# Altium PCB ratopus.PcbDoc (part 2 of 3)
Units mm, origin at the board's own origin, x right, y up, seen from the top; angles counter-clockwise.
Board outline 160 x 100 mm, 2 copper layers (Top Layer, Bottom Layer); 132 components, 69 nets, 422 pads, 0 vias.
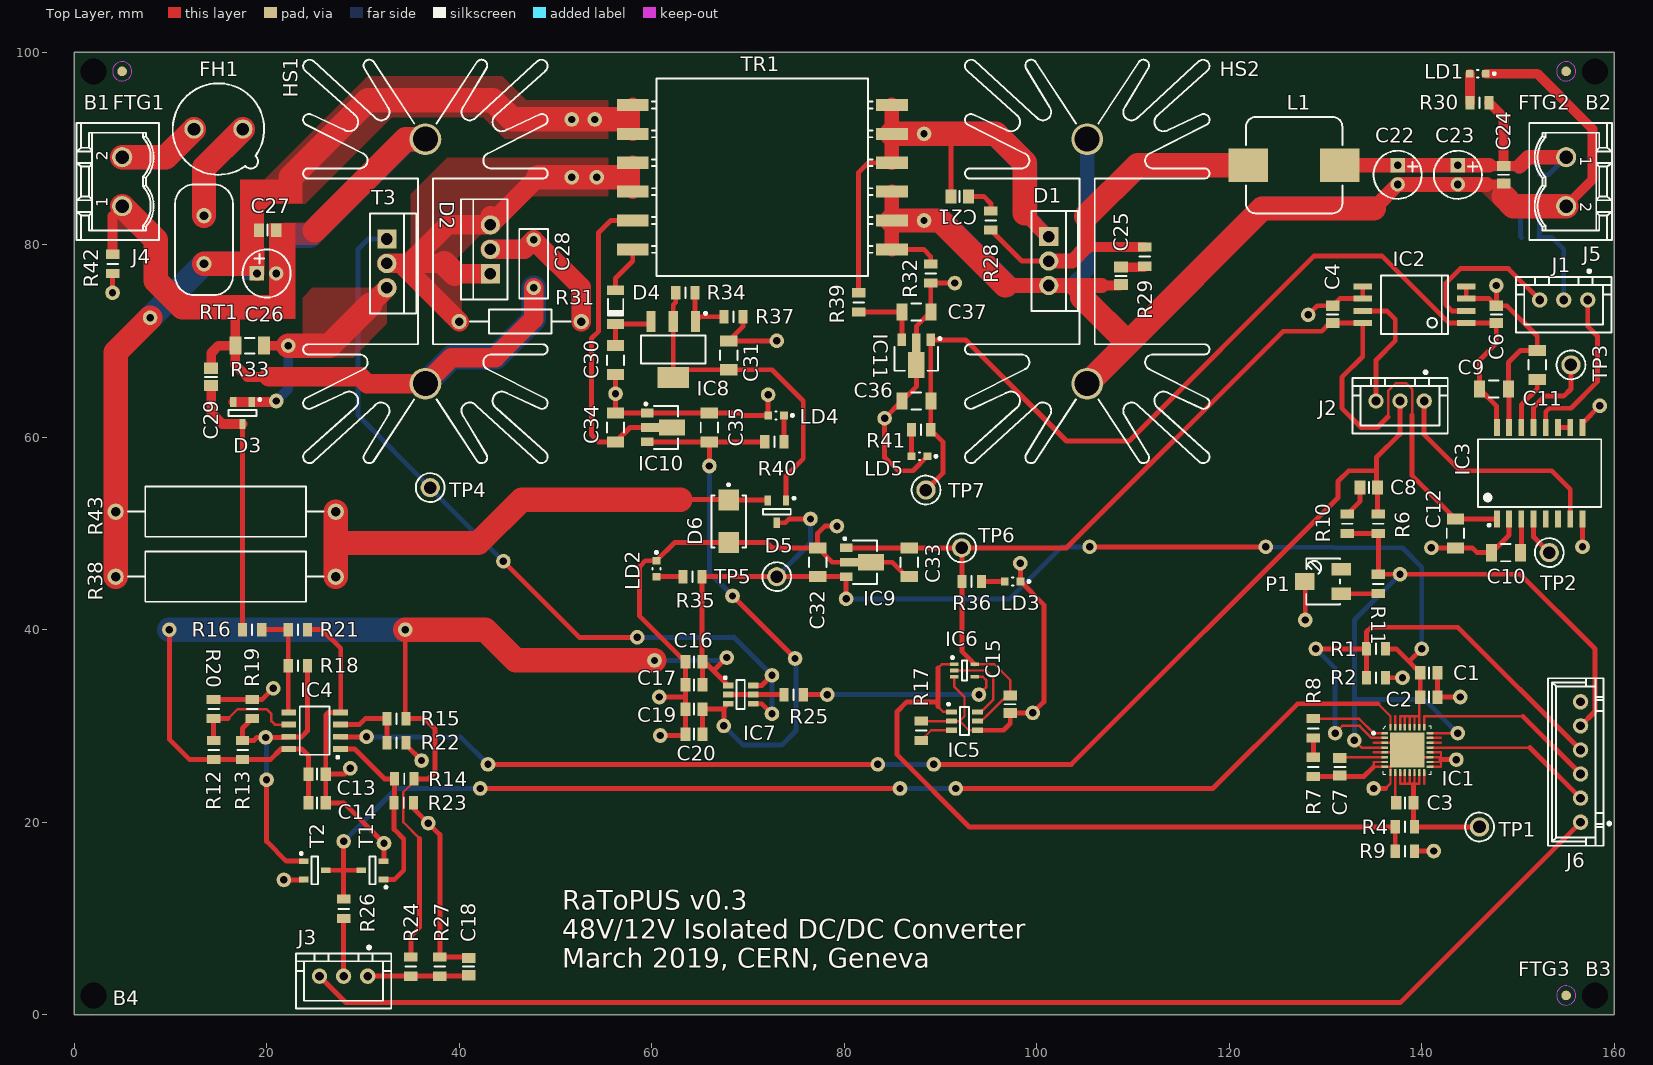
[diagram p0: Top Layer view]

## Part data (continued)
R20: library part R0805_2K_0.01%_0.2W_0.2PPM_VISHAY_VSMP, "Resistor - 0.01%", Case=0805, Manufacturer="VISHAY PRECISION", Manufacturer1 ComponentHeight=0.64mm, Manufacturer Part Number=Y16242K00000T9R, Power=0.2W, Tolerance=±0.01%, Author="CERN DEM JLC", Component Type=Standard, CreateDate=22/09/2011, HelpURL=\\cern.ch\dfs\Applications\Altium\Datasheets\R0805_VISHAY_VSMP.pdf, LatestRevisionDate=22/09/2011, Mounted=Yes, Part Description="Ultra High Precision Foil Wraparound Surface Mount Chip Resistor", Part Number=R0805_2K_0.01%_0.2W_0.2PPM_VISHAY_VSMP, Pin Count=2, PressFit=No, Sense=No, SMD=Yes, Socket=No, Status=None, TC=±0.2ppm/°C
R22: library part R0805_9K1_0.1%_0.1W_10PPM, "Resistor - 0.1%", Case=0805, Manufacturer=GENERIC, Manufacturer1 ComponentHeight=0.6mm, Manufacturer1 Example="TYCO HOLSWORTHY", Manufacturer1 Part Number=RN73C2A9K1BTG, Power=0.1W, Tolerance=±0.1%, Author="CERN DEM JLC", Component Type=Standard, CreateDate=25/03/2014, HelpURL=\\cern.ch\dfs\Applications\Altium\Datasheets\R0805_Tyco_RN73.pdf, LatestRevisionDate=25/03/2014, Manufacturer Part Number=R0805_9K1_0.1%_0.1W_10PPM, Mounted=Yes, Part Description="Thin Film Chip Resistor", Part Number=R0805_9K1_0.1%_0.1W_10PPM, Pin Count=2, PressFit=No, Sense=No, SMD=Yes, Socket=No, Status="Not Recommended", TC=±10ppm
R25: library part R0805_180R_1%_0.125W_100PPM, "Resistor - 1%", Case=0805, Manufacturer=GENERIC, Manufacturer1 ComponentHeight=0.6mm, Manufacturer1 Example="NIC COMPONENT", Manufacturer1 Part Number=NRC10F1800TRF, Power=0.125W, Tolerance=±1%, Author="CERN DEM JLC", Component Type=Standard, CreateDate=03/12/2007, HelpURL=\\cern.ch\dfs\Applications\Altium\Datasheets\R0805_NIC_NRC.pdf, LatestRevisionDate=13/03/2008, Manufacturer Part Number=R0805_180R_1%_0.125W_100PPM, Mounted=Yes, Part Description="General Purpose Thick Film Chip Resistor", Part Number=R0805_180R_1%_0.125W_100PPM, Pin Count=2, PressFit=No, Sense=No, SMD=Yes, Socket=No, Status=Preferred, TC=±100ppm/°C
R26: library part R0805_10K_0.1%_0.1W_10PPM, "Resistor - 0.1%", Case=0805, Manufacturer=GENERIC, Manufacturer1 ComponentHeight=0.6mm, Manufacturer1 Example="TYCO HOLSWORTHY", Manufacturer1 Part Number=RN73C2A10KBTG, Power=0.1W, Tolerance=±0.1%, Author="CERN DEM JLC", Component Type=Standard, CreateDate=03/12/2007, HelpURL=\\cern.ch\dfs\Applications\Altium\Datasheets\R0805_Tyco_RN73.pdf, LatestRevisionDate=13/03/2008, Manufacturer Part Number=R0805_10K_0.1%_0.1W_10PPM, Mounted=Yes, Part Description="Thin Film Chip Resistor", Part Number=R0805_10K_0.1%_0.1W_10PPM, Pin Count=2, PressFit=No, Sense=No, SMD=Yes, Socket=No, Status="Not Recommended", TC=±10ppm
R28 R29: library part R0805_33R_1%_0.125W_100PPM, "Resistor - 1%", Case=0805, Manufacturer=GENERIC, Manufacturer1 ComponentHeight=0.6mm, Manufacturer1 Example="NIC COMPONENT", Manufacturer1 Part Number=NRC10F33R0TRF, Power=0.125W, Tolerance=±1%, Author="CERN DEM JLC", Component Type=Standard, CreateDate=03/12/2007, HelpURL=\\cern.ch\dfs\Applications\Altium\Datasheets\R0805_NIC_NRC.pdf, LatestRevisionDate=13/03/2008, Manufacturer Part Number=R0805_33R_1%_0.125W_100PPM, Mounted=Yes, Part Description="General Purpose Thick Film Chip Resistor", Part Number=R0805_33R_1%_0.125W_100PPM, Pin Count=2, PressFit=No, Sense=No, SMD=Yes, Socket=No, Status=Preferred, TC=±100ppm/°C
R30 R35: library part R0805_820R_0.1%_0.125W_10PPM, "Resistor - 0.1%", Case=0805, Manufacturer=GENERIC, Manufacturer1 ComponentHeight=0.6mm, Manufacturer1 Example=PANASONIC, Manufacturer1 Part Number=ERA6ARB821P, Power=0.125W, Tolerance=±0.1%, Author="CERN DEM JLC", Component Type=Standard, CreateDate=08/03/2010, HelpURL=\\cern.ch\dfs\Applications\Altium\Datasheets\R0805_PANASONIC_ERA.pdf, LatestRevisionDate=08/03/2010, Manufacturer Part Number=R0805_820R_0.1%_0.125W_10PPM, Mounted=Yes, Part Description="Thin Film Chip Resistor", Part Number=R0805_820R_0.1%_0.125W_10PPM, Pin Count=2, PressFit=No, Sense=No, SMD=Yes, Socket=No, Status="Not Recommended", TC=±10ppm
R31: library part RMF_47R_5%_1W_250PPM_1270-650X250, "Resistor - 5%", Case="LS12.7 L6.5 x D2.5", Manufacturer=GENERIC, Manufacturer1 ComponentHeight=2.5mm, Manufacturer1 Example="VISHAY BCCOMPONENT", Manufacturer1 Part Number=PR01000104709JA100, Part Number=RMF_15R_5%_1W_250PPM_1270-650X250, Power=1W, Tolerance=±5%, Author="CERN DEM JLC", ComponentHeight=2.5mm, Component Type=Standard, CreateDate=09/06/2009, HelpURL=\\cern.ch\dfs\Applications\Altium\Datasheets\RMF_VISHAY_PR01.pdf, LatestRevisionDate=01/10/2012, Manufacturer Part Number=RMF_47R_5%_1W_250PPM_1270-650X250, Mounted=Yes, Part Description="Leaded Power Metal Film Resistor", Pin Count=2, PressFit=No, Sense=No, SMD=No, Socket=No, Status=Preferred, TC=±250ppm/°C
R32 R42: library part R0805_0R_JUMPER, "Resistor", Case=0805, Manufacturer=GENERIC, Manufacturer1 ComponentHeight=0.6mm, Manufacturer1 Example="NIC COMPONENT", Manufacturer1 Part Number=NRC10Z0, Author="CERN DEM JLC", Component Type=Standard, CreateDate=03/12/2007, HelpURL=\\cern.ch\dfs\Applications\Altium\Datasheets\R0805_NIC_NRC.pdf, LatestRevisionDate=13/03/2008, Manufacturer Part Number=R0805_0R_JUMPER, Mounted=Yes, Part Description="2A (0.05R Max DC Resistance) Zero Ohm Jumper", Part Number=R0805_0R_JUMPER, Pin Count=2, PressFit=No, Sense=No, SMD=Yes, Socket=No, Status=Preferred
R33: library part R1206_0R02_1%_1W_150PPM, "Resistor - 1%", Case=1206, Manufacturer=PANASONIC, Manufacturer Part Number=ERJ8CWFR050V, Part Number=R1206_0R05_1%_1W_150PPM, Power=1W, Tolerance=±1%, Author="CERN DEM JLC", ComponentHeight=0.8mm, Component Type=Standard, CreateDate=03/09/2012, HelpURL=\\cern.ch\dfs\Applications\Altium\Datasheets\R1206_PANASONIC_ERJ8BW.pdf, LatestRevisionDate=03/09/2012, Mounted=Yes, Part Description="Low Value Thick Film Chip Resistor", Pin Count=2, PressFit=No, Sense=No, SMD=Yes, Socket=No, Status="Not Recommended", TC=±150ppm/°C
R34: library part R0805_680R_1%_0.125W_100PPM, "Resistor - 1%", Case=0805, Manufacturer=GENERIC, Manufacturer1 ComponentHeight=0.6mm, Manufacturer1 Example="NIC COMPONENT", Manufacturer1 Part Number=NRC10F6800TRF, Power=0.125W, Tolerance=±1%, Author="CERN DEM JLC", Component Type=Standard, CreateDate=03/12/2007, HelpURL=\\cern.ch\dfs\Applications\Altium\Datasheets\R0805_NIC_NRC.pdf, LatestRevisionDate=13/03/2008, Manufacturer Part Number=R0805_680R_1%_0.125W_100PPM, Mounted=Yes, Part Description="General Purpose Thick Film Chip Resistor", Part Number=R0805_680R_1%_0.125W_100PPM, Pin Count=2, PressFit=No, Sense=No, SMD=Yes, Socket=No, Status=Preferred, TC=±100ppm/°C
R36 R40: library part R0805_330R_0.1%_0.1W_25PPM, "Resistor - 0.1%", Case=0805, Manufacturer=GENERIC, Manufacturer1 ComponentHeight=0.5mm, Manufacturer1 Example="TT ELECTRONICS", Manufacturer1 Part Number=PCF0805PR-330RBT1, Power=0.1W, Tolerance=±0.1%, Author="CERN DEM JLC", Component Type=Standard, CreateDate=05/10/2010, HelpURL="\\cern.ch\dfs\Applications\Altium\Datasheets\R0805_TT ELECTRONICS_PCF.pdf", LatestRevisionDate=25/10/2018, Manufacturer Part Number=R0805_330R_0.1%_0.1W_25PPM, Mounted=Yes, Part Description="Precision Surface Mount Resistor", Part Number=R0805_330R_0.1%_0.1W_25PPM, Pin Count=2, PressFit=No, Sense=No, SMD=Yes, Socket=No, Status="Not Recommended", TC=±25ppm/°C
R37: library part R0805_4K7_1%_0.125W_100PPM, "Resistor - 1%", Case=0805, Manufacturer=GENERIC, Manufacturer1 ComponentHeight=0.6mm, Manufacturer1 Example="NIC COMPONENT", Manufacturer1 Part Number=NRC10F4701TRF, Power=0.125W, Tolerance=±1%, Author="CERN DEM JLC", Component Type=Standard, CreateDate=03/12/2007, HelpURL=\\cern.ch\dfs\Applications\Altium\Datasheets\R0805_NIC_NRC.pdf, LatestRevisionDate=13/03/2008, Manufacturer Part Number=R0805_4K7_1%_0.125W_100PPM, Mounted=Yes, Part Description="General Purpose Thick Film Chip Resistor", Part Number=R0805_4K7_1%_0.125W_100PPM, Pin Count=2, PressFit=No, Sense=No, SMD=Yes, Socket=No, Status=Preferred, TC=±100ppm/°C
R38 R43: library part RMF_680R_5%_3W_250PPM_2286-1670X520, "Resistor - 5%", Case="LS22.86 L16.7 x D5.2", Manufacturer=GENERIC, Manufacturer1 ComponentHeight=5.2mm, Manufacturer1 Example="VISHAY BCCOMPONENT", Manufacturer1 Part Number=PR03000206800JAC00, Power=3W, Tolerance=±5%, Author="CERN DEM JLC", ComponentHeight=5.2mm, Component Type=Standard, CreateDate=19/06/2008, HelpURL=\\cern.ch\dfs\Applications\Altium\Datasheets\RMF_VISHAY_PR03.pdf, LatestRevisionDate=01/10/2012, Manufacturer Part Number=RMF_680R_5%_3W_250PPM_2286-1670X520, Mounted=Yes, Part Description="Leaded Power Metal Film Resistor", Part Number=RMF_680R_5%_3W_250PPM_2286-1670X520, Pin Count=2, PressFit=No, Sense=No, SMD=No, Socket=No, Status=Preferred, TC=±250ppm/°C